# Altium PCB SFP-Interface.PcbDoc
Units mil, origin at the board's own origin, x right, y up, seen from the top; angles counter-clockwise.
Board outline 2000 x 1825 mil, 2 copper layers (Top Layer, Bottom Layer), stack 61.811 mil thick; 39 components, 30 nets, 211 pads, 45 vias.
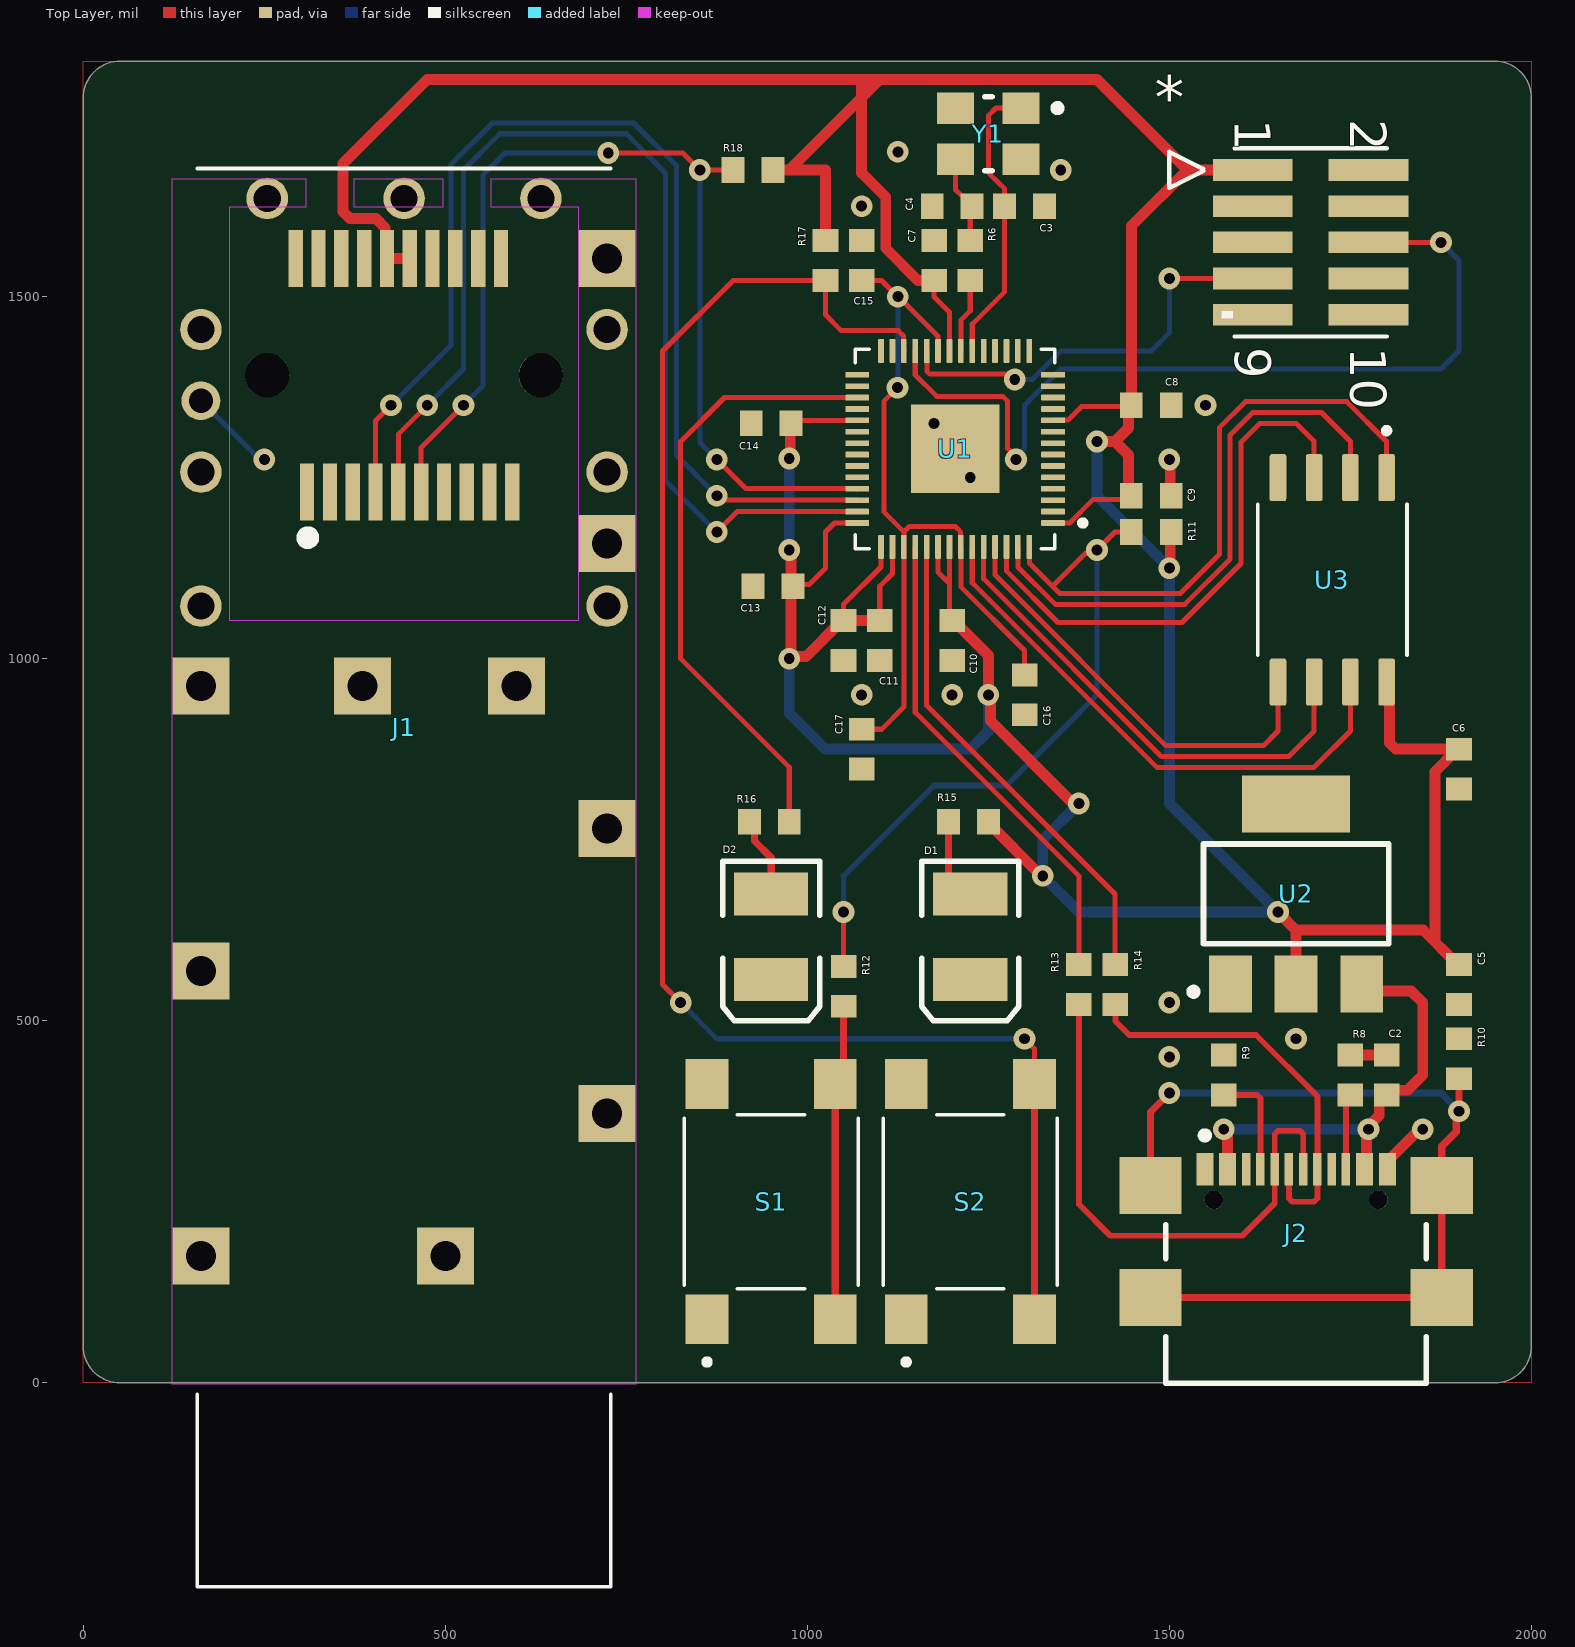
[diagram p0: Top Layer view]
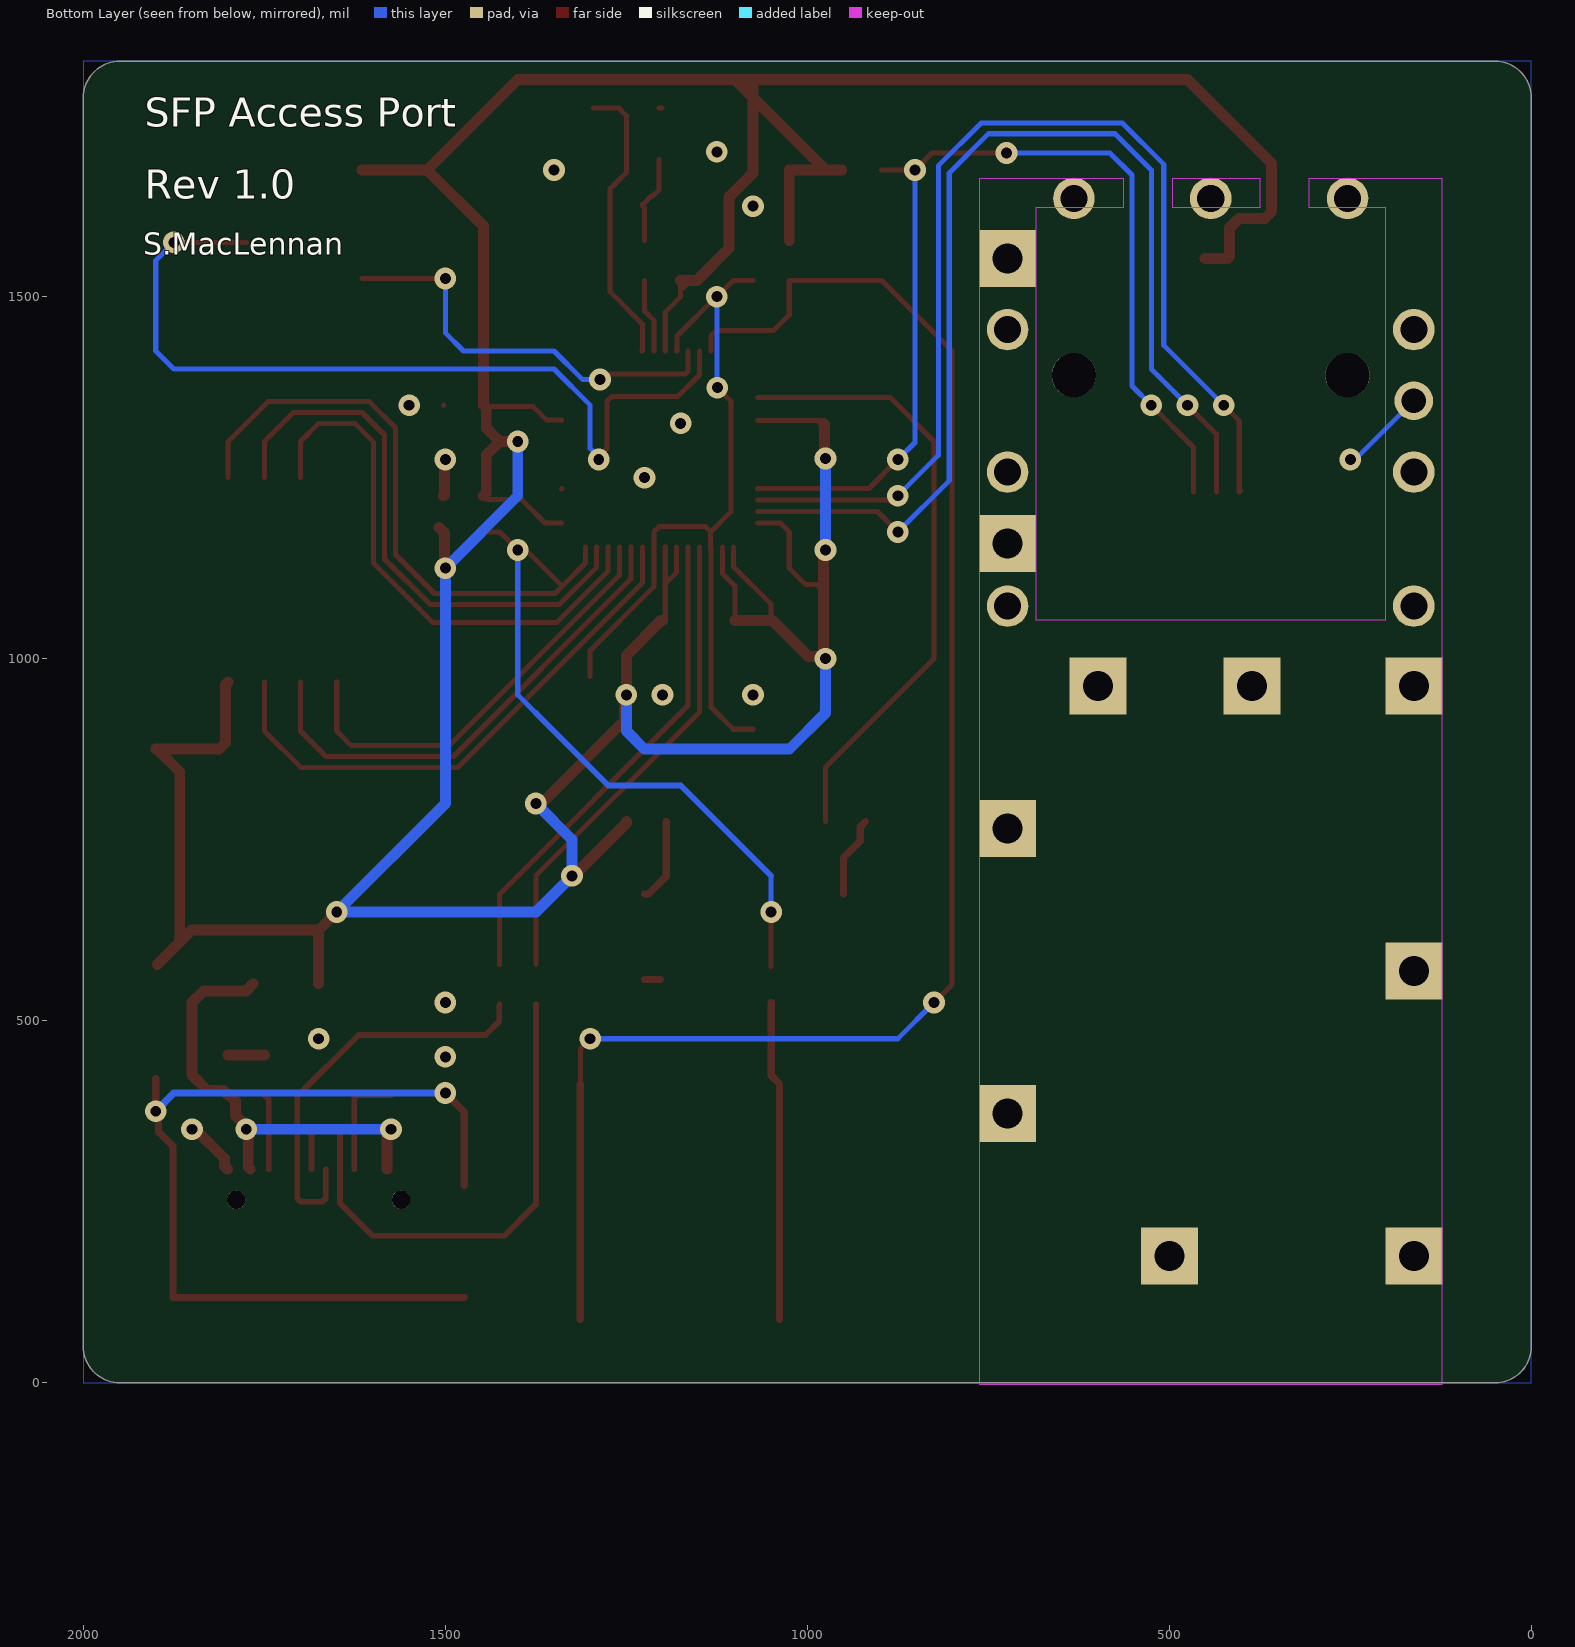
[diagram p1: Bottom Layer view, seen from below]

## Layer stack, top to bottom
Top Solder: solder mask 0.5, Solder Resist, Dk 3.8
Top Layer: signal copper 1.378
Dielectric: core 59.0551, FR-4, Dk 4.5
Bottom Layer: signal copper 1.378
Bottom Solder: solder mask 0.5, Solder Resist, Dk 3.8

## Board outline
0,50 0,1775 cw(c50,1775) 50,1825 1950,1825 cw(c1950,1775) 2000,1775 2000,50 cw(c1950,50) 1950,0 50,0 cw(c50,50)

## Design rules (kind name [scope] priority, off if disabled: settings)
BoardOutlineClearance [All] p1: gap=7.87 ignorepadtopadclearanceinfootprint=FALSE except(15.75: Arc-SplitBarrior Arc-SplitContinuation Track-SplitBarrior Track-SplitContinuation SMDPad-SplitBarrior SMDPad-SplitContinuation THPad-SplitBarrior THPad-SplitContinuation Via-SplitBarrior Via-SplitContinuation Fill-SplitBarrior Fill-SplitContinuation Poly-SplitBarrior Poly-SplitContinuation Region-SplitBarrior Region-SplitContinuation Text-SplitBarrior Text-SplitContinuation)
Clearance "Clearance Bottom Layer" [OnLayer('Bottom Layer')] p1: gap=8 ignorepadtopadclearanceinfootprint=TRUE except(10: Arc-Text Track-Text SMDPad-Text THPad-Text Via-Text Fill-Text Poly-Text Region-Text Text-Text)
Clearance "Clearance Top Layer" [OnLayer('Top Layer')] p2: gap=8 ignorepadtopadclearanceinfootprint=TRUE except(10: Arc-Via Arc-Text Track-Via Track-Text SMDPad-Text THPad-Text Via-Via Via-Text Fill-Text Poly-Text Region-Text Text-Text)
Clearance [All] p3: gap=7.87 ignorepadtopadclearanceinfootprint=FALSE except(3.5: Arc-Arc Arc-Track Arc-SMDPad Track-Track Track-SMDPad SMDPad-SMDPad; 5: Arc-Via Track-Via SMDPad-Via THPad-Via Via-Via; 10: Arc-Text Track-Text SMDPad-Text THPad-Text Via-Text Fill-Text Poly-Text Region-Text Text-Text)
HoleSize [All] p1: absolutevalues=TRUE maxlimit=248.03 minlimit=7.87 maxpercent=80.000 minpercent=20.000
MinimumAnnularRing [All] p1: minimumring=3
MinimumSolderMaskSliver [All] p1: minsoldermaskwidth=3.94
PolygonConnect PolygonConnect_1 [All] p1: thpad.connectstyle=Relief thpad.reliefconductorwidth=20 thpad.reliefentries=4 thpad.polygonreliefangle="90 Angle" thpad.airgapwidth=10 smdpad.connectstyle=Relief smdpad.reliefconductorwidth=20 smdpad.reliefentries=4 smdpad.polygonreliefangle="90 Angle" smdpad.airgapwidth=10 via.connectstyle=Direct via.reliefconductorwidth=20 via.reliefentries=4 via.polygonreliefangle="90 Angle" via.airgapwidth=10
RoutingCorners [All] p1: cornerstyle=Round minsetback=100 maxsetback=100
RoutingVias [All] p1: holewidth=19.68 width=39.37 viastyle="Through Hole" minholewidth=7.87 minwidth=17.72 maxholewidth=39.37 maxwidth=78.74
SilkToSilkClearance [All] p1: silktosilkclearance=3.94
SilkToSolderMaskClearance [IsPad] p1: minsilkscreentomaskgap=3.94 clearancetoexposedcopper=TRUE
SolderMaskExpansion [All] p1: expansion=4 istentingtop=FALSE
Width [All] p1: maxlimit=15 minlimit=3.5 preferedwidth=7 minimp=50.000000 maximp=50.000000 favimp=50.000000
25 further rules are at their usual default settings.

## Classes and differential pairs
component class SFP-Interface: C2 C3 C4 C5 C6 C7 C8 C9 C10 C11 C12 C13 C14 C15 C16 C17 D1 D2 J1 J2 R6 R8 R9 R10 R11 R12 R13 R14 R15 R16 R17 S1 S2 U1 U2 U3 Y1

## Components (designator, comment, footprint, x,y, rotation, side; value= is the part's Value field where it differs from the comment)
* "4048" 4048-Footprint-1 1570,1570 r270 top
C2 "Capacitor" 1608[0603] 1800,425 r270 top value=10uF
C3 "Capacitor" 1608[0603] 1300,1625 r180 top value=14pF
C4 "Capacitor" 1608[0603] 1200,1625 r0 top value=14pF
C5 "Capacitor" 1608[0603] 1900,550 r90 top value=10uF
C6 "Capacitor" 1608[0603] 1900,847.44 r90 top value=10nF
C7 "Capacitor" 1608[0603] 1175,1550 r270 top value=100nF
C8 "Capacitor" 1608[0603] 1475,1350 r180 top value=100nF
C9 "Capacitor" 1608[0603] 1475,1225 r180 top value=100nF
C10 "Capacitor" 1608[0603] 1200,1025 r90 top value=100nF
C11 "Capacitor" 1608[0603] 1100,1025 r90 top value=100nF
C12 "Capacitor" 1608[0603] 1050,1025 r90 top value=100nF
C13 "Capacitor" 1608[0603] 952.56,1100 r0 top value=100nF
C14 "Capacitor" 1608[0603] 950,1325 r0 top value=1uF
C15 "Capacitor" 1608[0603] 1075,1550 r270 top value=100nF
C16 "Capacitor" 1608[0603] 1300,950 r90 top value=100nF
C17 "Capacitor" 1608[0603] 1075,875 r90 top value=1uF
D1 "Light-Emitting Diode" 3.5X2.8X1.9 1225,615.94 r270 top
D2 "Light-Emitting Diode" 3.5X2.8X1.9 950,615.94 r270 top
J1 "2227023-1" TE_2227023-1 442.91,1391.54 r90 top locked
J2 "USB4110-GF-A" FP-USB4110-GF-A-MFG 1675,150 r0 top locked
R6 "Resistor" 1608[0603] 1225,1550 r270 top value=1K
R8 "Resistor" 1608[0603] 1750,425 r270 top value=5K11
R9 "Resistor" 1608[0603] 1575,425 r90 top value=5K11
R10 "Resistor" 1608[0603] 1900,447.44 r90 top value=1M
R11 "Resistor" 1608[0603] 1475,1175 r0 top value=10K
R12 "Resistor" 1608[0603] 1050,547.44 r270 top value=1K
R13 "Resistor" 1608[0603] 1375,550 r270 top value=27.4
R14 "Resistor" 1608[0603] 1425,550 r270 top value=27.4
R15 "Resistor" 1608[0603] 1222.44,775 r0 top value=55
R16 "Resistor" 1608[0603] 947.44,775 r0 top value=55
R17 "Resistor" 1608[0603] 1025,1550 r90 top value=10K
R18 "Resistor" 1608[0603] 925,1675 r180 top value=10K
S1 "TS05-66-43-BK-260-SMT-67" SW_TS05-66-43-BK-260-SMT-67 950,250 r90 top
S2 "TS05-66-43-BK-260-SMT-67" SW_TS05-66-43-BK-260-SMT-67 1225,250 r90 top
U1 "SC0908(7)" QFN40P700X700X90-57N 1204.13,1289.76 r180 top locked
U2 "NCP1117ST33T3G" ONSC-SOT-223-4-318H-01_A_V 1675,675 r90 top
U3 "AT25SF128A-SHB-T" SOIC127P790X216-8N 1725,1108.86 r270 top
Y1 "ECS-120-12-33Q-JES-TR" FP-ECX-33Q-MFG 1250,1725 r180 top

## Footprints (in the part's own frame and the unit in brackets; to place one, negate y for a bottom-side part, rotate by r counter-clockwise, add the part's x,y. Pads: shape width x height; smd on the part's side, far side on the other; paste and mask are expansions set on the pad)
3.5X2.8X1.9 [mm] "SM LED; 2 C-Bend Leads; Body 3.5 x 2.8 x 1.9 mm, inc leads (LxWxH typ)"
  rect 1.5x2.6 smd: 1(-1.5,0) 2(1.5,0)
  silkscreen extent -2.65,-1.7 2.95,1.7
1608[0603] [mm] "Chip Capacitor, Body 1.6x0.8mm, IPC High Density"
  rect 0.8x0.9 smd: 1(-0.7,0) 2(0.7,0)
  body extent -0.87,-0.48 0.87,0.48, height 1.3
4048-Footprint-1 [mil]
  rect 30x110 smd paste+0 mask+0: 1(-105,45) 2(-105,205) 3(-55,45) 4(-55,205) 5(-5,45) 6(-5,205) 7(45,45) 8(45,205) 9(95,45) 10(95,205)
  silkscreen extent -135,-70 125,230, body extent -130,2 120,248, height 235
FP-ECX-33Q-MFG [mm]
  rect 1.3x1.1 smd paste+0 mask+0: 1(-1.15,-0.9) 2(1.15,-0.9) 3(1.15,0.9) 4(-1.15,0.9)
  silkscreen extent -2.55,-1.3 0.13,1.3, body extent -1.9,-1.55 1.9,1.55, height 0.25
FP-USB4110-GF-A-MFG [mm]
  rect 2.18x2 smd paste+0 mask+0: 1(-5.11,3.105) 2(5.11,3.105) 3(-5.11,-0.825) 4(5.11,-0.825)
  rect 0.6x1.15 smd paste+0 mask+0: A1-B12(-3.2,3.68) A4-B9(-2.4,3.68) B1-A12(3.2,3.68) B4-A9(2.4,3.68)
  rect 0.3x1.15 smd paste+0 mask+0: A5(-1.25,3.68) A6(-0.25,3.68) A7(0.25,3.68) A8(1.25,3.68) B5(1.75,3.68) B6(0.75,3.68) B7(-0.75,3.68) B8(-1.75,3.68)
  round 0.65 hole 0.65 unplated paste-1000 mask+0: ""(-2.89,2.605) ""(2.89,2.605)
  silkscreen extent -4.57,-3.83 4.57,4.99, body extent -6.3,-3.92 6.3,4.36, height 0.25
ONSC-SOT-223-4-318H-01_A_V [mm] "SOT223, 4-Leads, Body 6.5x3.5mm, Pitch 2.3mm"
  rect 2x1.5 smd: 1(-3.15,2.3) 2(-3.15,0) 3(-3.15,-2.3)
  rect 2x3.8 smd: 4(3.15,0)
  silkscreen extent -3.55,-3.25 1.75,3.72, body extent -1.75,-3.25 1.75,3.25, height 1.8
QFN40P700X700X90-57N [mm]
  rrect25% 0.84x0.2 smd: 1(-3.435,2.6) 2(-3.435,2.2) 3(-3.435,1.8) 4(-3.435,1.4) 5(-3.435,1) 6(-3.435,0.6) 7(-3.435,0.2) 8(-3.435,-0.2) 9(-3.435,-0.6) 10(-3.435,-1) 11(-3.435,-1.4) 12(-3.435,-1.8) 13(-3.435,-2.2) 14(-3.435,-2.6) 29(3.435,-2.6) 30(3.435,-2.2) 31(3.435,-1.8) 32(3.435,-1.4) 33(3.435,-1) 34(3.435,-0.6) 35(3.435,-0.2) 36(3.435,0.2) 37(3.435,0.6) 38(3.435,1) 39(3.435,1.4) 40(3.435,1.8) 41(3.435,2.2) 42(3.435,2.6)
  rrect25% 0.2x0.84 smd: 15(-2.6,-3.435) 16(-2.2,-3.435) 17(-1.8,-3.435) 18(-1.4,-3.435) 19(-1,-3.435) 20(-0.6,-3.435) 21(-0.2,-3.435) 22(0.2,-3.435) 23(0.6,-3.435) 24(1,-3.435) 25(1.4,-3.435) 26(1.8,-3.435) 27(2.2,-3.435) 28(2.6,-3.435) 43(2.6,3.435) 44(2.2,3.435) 45(1.8,3.435) 46(1.4,3.435) 47(1,3.435) 48(0.6,3.435) 49(0.2,3.435) 50(-0.2,3.435) 51(-0.6,3.435) 52(-1,3.435) 53(-1.4,3.435) 54(-1.8,3.435) 55(-2.2,3.435) 56(-2.6,3.435)
  rect 3.1x3.1 smd paste-0.57: 57(0,0)
  silkscreen extent -4.57,-3.5 3.5,3.5, body extent -3.5,-3.5 3.5,3.5, height 0.9
SOIC127P790X216-8N [mm]
  rrect25% 1.65x0.58 smd: 1(-3.585,1.905) 2(-3.585,0.635) 3(-3.585,-0.635) 4(-3.585,-1.905) 5(3.585,-1.905) 6(3.585,-0.635) 7(3.585,0.635) 8(3.585,1.905)
  silkscreen extent -5.33,-2.62 2.65,2.62, body extent -3.99,-2.62 3.99,2.62, height 2.16
SW_TS05-66-43-BK-260-SMT-67 [mm]
  rect 1.75x1.5 smd: 1(-4.125,2.25) 2(-4.125,-2.25) 3(4.125,2.25) 4(4.125,-2.25)
  silkscreen extent -5.72,-3.05 3.05,3.05
TE_2227023-1 [mm]
  rect 2x0.5 smd: 1(-4.1,3.4) 2(-4.1,2.6) 3(-4.1,1.8) 4(-4.1,1) 5(-4.1,0.2) 6(-4.1,-0.6) 7(-4.1,-1.4) 8(-4.1,-2.2) 9(-4.1,-3) 10(-4.1,-3.8) 11(4.1,-3.4) 12(4.1,-2.6) 13(4.1,-1.8) 14(4.1,-1) 15(4.1,-0.2) 16(4.1,0.6) 17(4.1,1.4) 18(4.1,2.2) 19(4.1,3) 20(4.1,3.8)
  round 1.358 hole 0.85: S1(-0.9,7.125)
  round 1.458 hole 0.95: S2(1.6,7.125) S3(-3.4,7.125) S4(-8.1,7.125) S5(6.2,4.8) S6(6.2,0) S7(6.2,-4.8) S8(1.6,-7.125) S9(-3.4,-7.125) S10(-8.1,-7.125)
  rect 2x2 hole 1.05: S11(-10.9,7.125) S12(-20.9,7.125) S13(-30.9,7.125) S14(-10.9,1.45) S15(-30.9,-1.45) S16(-10.9,-3.95) S17(-25.9,-7.125) S18(-15.9,-7.125) S19(-5.9,-7.125) S20(4.1,-7.125)
  round 1.55 hole 1.55 unplated: ""(0,4.8) ""(0,-4.8)
  Keep-Out Layer region: 6.9,3.445 5.9,3.445 5.9,6.125 -8.6,6.125 -8.6,-6.125 5.9,-6.125 5.9,-3.055 6.9,-3.055 6.9,-8.125 -35.4,-8.125 -35.4,8.125 6.9,8.125
  Keep-Out Layer region: 6.9,-1.355 5.9,-1.355 5.9,1.745 6.9,1.745
  Keep-Out Layer region: 6.9,3.445 5.9,3.445 5.9,6.125 -8.6,6.125 -8.6,-6.125 5.9,-6.125 5.9,-3.055 6.9,-3.055 6.9,-8.125 -35.4,-8.125 -35.4,8.125 6.9,8.125
  Keep-Out Layer region: 6.9,-1.355 5.9,-1.355 5.9,1.745 6.9,1.745
  Keep-Out Layer region: 6.9,3.445 5.9,3.445 5.9,6.125 -8.6,6.125 -8.6,-6.125 5.9,-6.125 5.9,-3.055 6.9,-3.055 6.9,-8.125 -35.4,-8.125 -35.4,8.125 6.9,8.125
  Keep-Out Layer region: 6.9,-1.355 5.9,-1.355 5.9,1.745 6.9,1.745
  silkscreen extent -42.5,-7.25 7.25,7.25

## Part data
*: library part CMP-002-00071-2, "Mini SWD 0.05\" Pitch Connector - 10 Pin SMT Box Header"
D1 D2: library part LED, AF=1, BV=0, BV_MAX=1e99, CJO=0, CJP=0, CTA=0, CTP=0, EG=1.11, FC=0.5, FCS=0.5, FV_MAX=1e99, IBV=0.001, IKF=0, IKR=0, IS=1e-14, ISR=1e-14, JSW=0, JTUN=0, JTUNSW=0, KEG=1, KF=0, LEVEL=1, MJSW=0.33, N=1, NBV=1, NR=1, NS=1, NTUN=30, PHP=1, RS=0, SimulationGenericComponent=True, TCV=0, TLEV=0, TLEVC=0, TM1=0, TM2=0, TNOM=27, TPB=0, TPHP=0, TRS=0, TRS2=0, TT=0, TTT1=0, TTT2=0, VJ=1, XTI=3, XTITUN=3
J1: "Connector Accessories 1 Port SFP Cage Press Fit Right Angle Through Hole Nickel Tray", Package=None, Availability=Unavailable, EU_RoHS_Compliance=Compliant, MF="TE Connectivity", MP=2227023-1, Price=None, Product_Type=Cage, SnapEDA_Link=https://www.snapeda.com/parts/2227023-1/TE%20Connectivity%20AMP%20Connectors/view-part/1472255/?ref=snap, TE_purchase_URL=https://www.te.com/usa-en/product-2227023-1.html?te_bu=Cor&te_type=disp&te_campaign=seda_glo_cor-seda-global-disp-prtnr-fy19-seda-model-bom-cta_sma-317_1&elqCampaignId=32493
J2: library part CMP-245163-000002-1, "CONN USB 2.0 TYPE-C R/A SMT", Current Rating=3/4.25/1.25/0.25A, Manufacturer=GCT, Package=0, Temperature="-40°C to +85°C", Temperature Range High=+85°C, Temperature Range Low=-40°C, Voltage Rating=20V, Automotive=No, Category=Conn, ComponentLink2Description=Datasheet, ComponentLink2URL=https://gct.co/files/drawings/usb4110.pdf, Conn Orientation="Right Angle", Contact Material=Gold,Nickel, Device Class L1=Connectors, Device Class L2="USB Connectors", Device Class L3=unset, Digikey Description="CONN USB 2.0 TYPE-C R/A SMT", Height=3.46mm, Is Female=yes, Lead Free=Yes, Manufacturer Part Number=USB4110-GF-A, Number Of Contacts=16, Octopart=https://octopart.com/usb4110-gf-a-gct-103941985, RoHS=TRUE, Shielding=true, Standoff Height=0.1mm, Usb Standard="USB 2.0"
S1 S2: "6 x 6 mm, 4.3 ~ 8 mm Actuator Height, 100 ~ 260 gf, Surface Mount, IP67, SPST, Tactile Switch", Package=None, Availability="In Stock", Check_prices=https://www.snapeda.com/parts/TS05-66-43-BK-260-SMT-67/CUI+Devices/view-part/?ref=eda, CUI_purchase_URL=https://www.cuidevices.com/product/switches/tactile-switches/ts05-series?utm_source=snapeda.com&utm_medium=referral&utm_campaign=snapedaBOM, MF="CUI Devices", MP=TS05-66-43-BK-260-SMT-67, Price=None, Purchase-URL=https://pricing.snapeda.com/search/part/TS05-66-43-BK-260-SMT-67/?ref=eda, SnapEDA_Link=https://www.snapeda.com/parts/TS05-66-43-BK-260-SMT-67/CUI+Devices/view-part/?ref=snap
U1: "No Description Available", Mfr_Name="Raspberry Pi", Copyright="Copyright (C) 2022 Ultra Librarian. All rights reserved.", Digi-Key_Part_Number_1=2648-SC0908(7)TR-ND, Digi-Key_Part_Number_2=2648-SC0908(7)CT-ND, Digi-Key_Part_Number_3=2648-SC0908(7)DKR-ND, Manufacturer_Part_Number=SC0908(7), RefDes=RefDes, Type=DEV
U2: library part CMP-1679-00010-1, "Low-Dropout Positive Fixed Voltage Regulator, 1 A, 3.3 V Output Voltage, 0 to 125 degC, 4-Pin SOT-223 (318H-01), Pb-Free, Tape and Reel", Case Code (Imperial)=0603, Case Code (Metric)=1608, Max Operating Temperature="155 degC", Min Operating Temperature="-55 degC", Package Quantity=5000, Power Rating="100 mW", Resistance="220 kohm", Tolerance=1%, Type (Resistor)="Thick Film", Voltage Rating="75 V", Case\Package=0603, ComponentLink1Description="Manufacturer URL", ComponentLink1URL=http://www.onsemi.com/, ComponentLink2Description=Datasheet, ComponentLink2URL=http://www.onsemi.com/pub_link/Collateral/NCP1117-D.PDF, DatasheetVersion="Rev. 27, 09/2014", Height="0.45 mm", Length="1.55 mm", Mount="Surface Mount", PackageDescription="4-Pin Small Outline Transistor, Body 6.5 x 3.5 mm, Pitch 2.3 mm", PackageReference=SOT-223-4-318H-01_A, Packaging="Tape and Reel", Radiation Hardening=No, REACH SVHC=Unknown, RoHSCompliant=true, Weight="7.1E-05 oz", Width="0.85 mm"
U3: "No Description Available", Mfr_Name="Adesto Technologies", Copyright="Copyright (C) 2022 Ultra Librarian. All rights reserved.", Digi-Key_Part_Number_1=1265-1348-2-ND, Digi-Key_Part_Number_2=1265-1348-1-ND, Digi-Key_Part_Number_3=1265-1348-6-ND, Manufacturer_Part_Number=AT25SF128A-SHB-T, RefDes=RefDes, Type=DEV
Y1: library part CMP-40224-000015-1, "CRYSTAL 12.000MHZ 12PF SMD", Case/Package=SMD/SMT, ESR (Equivalent Series Resistance)=100R, Frequency=12MHz, Frequency Stability=50ppm, Frequency Tolerance=20ppm, Load Capacitance=12pF, Max Operating Temperature=125°C, Min Operating Temperature=-40°C, Ratings=AEC-Q200, Height=0.031inch, Length=0.126inch, Mount="Surface Mount", Packaging="Tape and Reel", Width=0.098inch
C2 C3 C4 C5 C6 C7 C8 C9 C10 C11 C12 C13 C14 C15 C16 C17: SimulationGenericComponent=True
R6 R8 R9 R10 R11 R12 R13 R14 R15 R16 R17 R18: SimulationGenericComponent=True, TC1=0, TC2=0

## Via types
v1: diameter 30, hole 15, Top Layer to Bottom Layer, 45 vias

## Nets (pads, with @x,y where several pads share a name; then routed paths per layer and width w, separated by ;. In a path a pad name is that pad's centre, name@x,y a point inside that pad or via, vN(x,y) a via of type N, cw(c..) or ccw(c..) an arc to the next point about the centre after c; other vN are vias at no path point)
+3.3V: *.1 C5.2 C6.2 C7.2 C8.2 C9.2 C10.2 C11.2 C12.2 C13.2 C14.2 J1.15 J1.16 R11.2 R15.2 R17.2 R18.1 U1.1 U1.10 U1.22 U1.33 U1.42 U1.43 U1.44 U1.48 U1.49 U2.2 U3.8 | length 7208.4
  Top Layer w7: C14.2 981.69,1329.13 U1.33 ; C13.2 982.38,1102.27 1002.27,1102.27 1025,1125 1025,1175 1037.4,1187.4 U1.42 ; C12.2 1050,1075 1101.77,1126.77 U1.43 ; C11.2 1100,1100 1117.52,1117.52 U1.44 ; C7.2@1160.63,1522.83 1160.78,1522.83 1171.42,1512.2 C7.2@1175,1512.2 ; C7.2 C7.2@1175,1512.2 ; U1.48 1180.51,1119.49 1196.26,1103.74 ; U1.49 1196.26,1103.74 ; U1.22 1196.26,1478.44 1175,1499.7 C7.2@1175,1512.2 ; C10.2 1196.26,1056.3 1196.26,1103.74 ; U1.1 1362.4,1187.4 1395.02,1220.02 1442.46,1220.02 C9.2 ; U1.10 1339.68,1329.44 1360.09,1329.44 1378.68,1348.03 C8.2@1447.44,1348.03
  Top Layer w15: J1.15 J1.16 416.95,1555.3 416.95,1594.93 404.06,1607.82 368.29,1607.82 358.71,1617.4 358.71,1683.71 475,1800 1075,1800 ; R18.1 975,1675 ; v1(975,1000) v1@977.56,1002.56 ; v1(975,1150) 977.56,1147.44 C13.2@977.56,1102.56 ; v1(975,1276.5) 976.28,1277.78 976.28,1323.72 C14.2 ; C13.2 C13.2@977.56,1102.56 ; R17.2 1025,1675 975,1675 ; C11.2 C12.2 1048.03,1052.56 998.34,1002.87 977.87,1002.87 v1@977.56,1002.56 ; C7.2 1152.56,1522.44 1108.22,1566.78 1108.22,1637.75 1075,1670.96 1075,1775 ; C10.2 1201.97,1052.56 1250,1004.53 v1(1250,950) 1252.87,947.13 1252.87,914.19 1364.19,802.87 1372.13,802.87 v1(1375,800) ; R15.2 1250,773.03 1323.03,700 v1(1325,700) ; v1(1400,1300) 1425,1300 ; C9.2 1443.58,1228.86 1443.58,1281.42 1425,1300 ; v1(1500,1125) 1501.28,1126.28 1501.28,1173.72 R11.2 R11.2@1508.98,1181.42 ; *.1 1525,1675 ; v1(1650,650) 1675,625 ; U2.2 1675,625 ; U3.8 1803.92,963.8 1803.92,883.79 1812.7,875 C6.2 ; 1866.78,610.78 1866.78,731.39 1866.78,843.75 C6.2@1894.71,871.68 ; C5.2@1898.03,577.56 1850.59,625 1675,625 ; 975,1675 1075,1775 ; v1@977.56,1002.56 C13.2@977.56,1102.56 ; 1075,1775 1075,1800 ; 1075,1775 1100,1800 ; 1075,1800 1100,1800 ; 1100,1800 1400,1800 1525,1675 ; 1425,1300 1443.58,1318.58 1443.58,1346.14 C8.2 1447.44,1597.44 1525,1675
  Bottom Layer w15: v1(975,1000) 975,925 1025,875 1225,875 1250,900 v1(1250,950) ; v1(975,1150) v1(975,1276.5) ; v1(1375,800) 1325,750 v1(1325,700) 1375,650 v1(1650,650) 1500,800 v1(1500,1125) 1400,1225 v1(1400,1300)
+5V: C2.2 J2.A4-B9 J2.B4-A9 U2.3 | length 630.4
  Top Layer w15: v1(1575,350) 1575,345.94 1580.51,340.43 J2.A4-B9 ; U2.3 1775.33,541.21 1833.79,541.21 1850,525 1850,425 1828.86,403.86 1806.42,403.86 C2.2 1798.03,397.44 1789.78,389.19 1789.78,368.84 1775,354.06 v1(1775,350) 1772.24,347.24 1772.24,297.64 J2.B4-A9
  Bottom Layer w15: v1(1575,350) v1(1775,350)
GND: *.2 *.3 *.4 *.5 C2.1 C3.1 C4.1 C5.1 C6.1 C7.1 C8.1 C9.1 C10.1 C11.1 C12.1 C13.1 C14.1 C15.1 C16.1 C17.1 D1.2 D2.2 J1.1 J1.9 J1.10 J1.11 J1.14 J1.17 J1.20 J1.S1 J2.A1-B12 J2.B1-A12 R8.1 R9.2 R10.2 S1.1 S1.3 S2.1 S2.3 U1.57 U2.1 U3.4 Y1.2 Y1.4 | length 326
  Top Layer w7: Y1.2@1200.79,1760.43 Y1.2
  Top Layer w10: D1.2@1203.35,556.89 D1.2
  Top Layer w15: v1(1500,1275) 1501.28,1273.72 1501.28,1226.28 C9.1 ; R8.1 C2.1 ; J2.B1-A12 1805.3,299.19 1805.3,310.02 1842.41,347.13 1847.13,347.13 v1(1850,350)
  Bottom Layer w7: J1.S1 239.1,1279.4 245.6,1279.4 v1(250,1275)
  other v1: 1500,450 1675,475 1500,525 1075,950 1200,950 1225,1250 1175,1325 1550,1350 1075,1625 1350,1675 1125,1700
Net*_6: *.6 U1.25 | length 1232.5
  Top Layer w7: U1.25 1149.02,1391.87 1178.6,1362.29 1269.92,1362.29 1276.66,1355.55 1276.66,1290.6 1288.16,1279.1 v1(1288.16,1275) ; *.6 v1(1875,1575)
  Bottom Layer w7: v1(1288.16,1275) 1288.16,1278.76 1300,1290.6 1300,1350 1350,1400 1875,1400 1900,1425 1900,1550 v1(1875,1575)
Net*_7: *.7 U1.24 | length 584.5
  Top Layer w7: U1.24 1165.07,1424.69 1165.07,1397.02 1169.18,1392.92 1272.81,1392.92 1280.23,1385.5 v1(1286.45,1385.5) ; v1(1500,1525) *.7
  Bottom Layer w7: v1(1286.45,1385.5) 1286.78,1385.82 1310.82,1385.82 1350,1425 1475,1425 1500,1450 v1(1500,1525)
NetC3_2: C3.2 U1.20 Y1.1 | length 403
  Top Layer w7: U1.20@1228.07,1425.31 U1.20 1227.76,1462 1272.44,1506.68 1272.44,1649.14 1265.17,1656.41 1264.92,1656.41 1250,1671.33 1250,1750 1260.43,1760.43 Y1.1
NetC4_2: C4.2 R6.1 Y1.3 | length 123.7
  Top Layer w7: Y1.3 1204.72,1647.83 1213.34,1639.22 1215.31,1639.22 1227.56,1626.97 C4.2 1225,1622.44 R6.1
NetC15_2: C15.2 C16.2 C17.2 U1.23 U1.45 U1.50 | length 1135.3
  Top Layer w7: C17.2 1102.56,902.56 1133.27,933.27 U1.45 1133.58,1154.84 1133.58,1175.25 1140.89,1182.56 1204.38,1182.56 1211.7,1175.25 1211.7,1154.84 U1.50 1212.01,1099.35 1300,1011.36 C16.2@1300,975.59 ; C15.2 1102.37,1522.44 v1@1124.81,1500 ; v1(1124.38,1374.38) 1105.67,1355.67 1105.67,1202.85 1133.27,1175.25 ; v1(1125,1500) 1125.92,1500 1180.2,1445.72 1180.2,1425.31 U1.23
  Bottom Layer w7: v1(1124.38,1374.38) 1125,1375 v1(1125,1500)
NetD1_1: D1.1 R15.1 | length 115.8
  Top Layer w10: R15.1 1194.88,699.53 1219.41,675 D1.1
NetD2_1: D2.1 R16.1 | length 112.5
  Top Layer w10: R16.1 926.86,768.02 926.86,748.14 950,725 D2.1
NetJ1_4: J1.4 U1.40 | length 1533.3
  Top Layer w7: J1.4@401.77,1231.89 J1.4 403.54,1328.54 v1(425,1350) ; v1(875,1225) 881.1,1218.9 U1.40
  Bottom Layer w7: v1(425,1350) 507.76,1432.76 507.76,1682.76 565,1740 760,1740 819.08,1680.92 819.08,1280.92 v1(875,1225)
NetJ1_5: J1.5 U1.41 | length 1535.2
  Top Layer w7: J1.5 435.04,1310.04 v1(475,1350) ; v1(875,1175) 903.15,1203.15 U1.41
  Bottom Layer w7: v1(475,1350) 525,1400 525,1675 575,1725 750,1725 804.08,1670.92 804.08,1245.92 v1(875,1175)
NetJ1_6: J1.6 R18.2 U1.39 | length 1463.1
  Top Layer w7: J1.6 466.54,1291.54 v1(525,1350) ; v1(725,1698.5) 828,1698.5 v1(851.5,1675) R18.2 ; v1(875,1275) 915.04,1234.96 1068.59,1234.96 U1.39
  Bottom Layer w7: v1(525,1350) 551.69,1376.69 551.69,1667.95 582.24,1698.5 v1(725,1698.5) ; v1@850,1675 v1(851.5,1675) 851.5,1298.5 v1(875,1275)
NetJ2_1: J2.1 J2.2 J2.3 J2.4 R10.1 | length 1263.5
  Top Layer w10: J2.3 J2.4 1876.18,326.61 1896.17,346.61 1896.17,371.17 v1(1900,375) R10.1 ; J2.1 1473.82,373.82 v1(1500,400)
  Bottom Layer w10: v1@1500.08,400 1875,400 v1(1900,375)
NetJ2_A5: J2.A5 R9.1 | length 150.6
  Top Layer w8: R9.1 1621.1,397.44 1625.79,392.75 J2.A5
NetJ2_A6: J2.A6 J2.B6 R14.2 | length 569.5
  Top Layer w8: R14.2 1425.62,521.82 1425.62,499.38 1444.69,480.31 1619.69,480.31 1704.53,395.47 J2.B6 1704.53,254.69 1699.84,250 1669.84,250 1665.16,254.69 J2.A6
NetJ2_A7: J2.A7 J2.B7 R13.2 | length 770.6
  Top Layer w8: R13.2 1375,246.35 1418.48,202.87 1600.5,202.87 1645.47,247.85 1645.47,343.42 1650.16,348.1 1680.16,348.1 1684.84,343.42 J2.A7
NetJ2_B5: J2.B5 R8.2 | length 105.1
  Top Layer w8: J2.B5 1743.9,391.34 R8.2
NetR6_2: R6.2 U1.21 | length 102.8
  Top Layer w7: U1.21 1212.01,1467.46 1225,1480.45 R6.2
NetR11_1: R11.1 R12.1 U1.56 U3.1 | length 1736.8
  Top Layer w7: R12.1 v1(1050,650) ; U1.56 1306.5,1132.14 1338.64,1100 ; R11.1 1425,1175 1395.6,1145.6 1384.24,1145.6 1338.64,1100 ; U3.1 1800,1300 1745,1355 1605,1355 1569,1319 1569,1144 1515,1090 1348.64,1090 1338.64,1100
  Bottom Layer w7: v1(1050,650) 1050,700 ; 1375,925 1400,950 v1(1400,1150)
  Bottom Layer w8: 1050,700 1175,825 1275,825 1375,925
NetR12_2: R12.2 S1.2 S1.4 | length 442.1
  Top Layer w10: S1.2 S1.4 1050,423.82 R12.2 R12.2@1050,525
NetR13_1: R13.1 U1.46 | length 670.6
  Top Layer w7: U1.46 1149.02,925.98 1375,700 1375,650 R13.1
NetR14_1: R14.1 U1.47 | length 684.8
  Top Layer w7: U1.47 1164.76,935.24 1425,675 R14.1
NetR16_2: R16.2 U1.31 | length 856.1
  Top Layer w7: R16.2 975,850 825,1000 825,1300 885.63,1360.63 U1.31
NetR17_1: R17.1 S2.2 S2.4 U1.26 | length 2252.8
  Top Layer w7: v1(825,525) 800,550 800,1425 897.44,1522.44 R17.1 1025,1475 1046.96,1453.04 1125.64,1453.04 1132.96,1445.72 1132.96,1425.31 U1.26 ; v1(1300,475) 1313.58,461.42 S2.4
  Top Layer w10: S2.2 S2.4
  Bottom Layer w7: v1(825,525) 875,475 v1(1300,475)
NetU1_51: U1.51 U3.7 | length 766
  Top Layer w7: U1.51 1227.76,1104.82 1482.69,849.89 1658.33,849.89 1699.89,849.89 1750,900 U3.7
NetU1_52: U1.52 U3.6 | length 684.6
  Top Layer w7: U1.52 1243.5,1110.28 1488.9,864.89 1664.89,864.89 1700,900 U3.6
NetU1_53: U1.53 U3.5 | length 603.3
  Top Layer w7: U1.53 1259.25,1115.75 1495.11,879.89 1629.89,879.89 1650,900 U3.5
NetU1_54: U1.54 U3.3 | length 760.2
  Top Layer w7: U1.54 1275.31,1154.22 1275.31,1120.9 1346.21,1050 1517.43,1050 1599,1131.57 1599,1299 1625,1325 1675,1325 1700,1300 U3.3
NetU1_55: U1.55 U3.2 | length 785.1
  Top Layer w7: U1.55 1291.06,1154.22 1291.06,1126.37 1342.43,1075 1521.21,1075 1584,1137.79 1584,1309 1615,1340 1710,1340 1750,1300 U3.2
pads on no net: *.8 *.9 *.10 J1. J1.2 J1.3 J1.7 J1.8 J1.12 J1.13 J1.18 J1.19 J1.S2 J1.S3 J1.S4 J1.S5 J1.S6 J1.S7 J1.S8 J1.S9 J1.S10 J1.S11 J1.S12 J1.S13 J1.S14 J1.S15 J1.S16 J1.S17 J1.S18 J1.S19 J1.S20 J2. J2.A8 J2.B8 U1.2 U1.3 U1.4 U1.5 U1.6 U1.7 U1.8 U1.9 U1.11 U1.12 U1.13 U1.14 U1.15 U1.16 U1.17 U1.18 U1.19 U1.27 U1.28 U1.29 U1.30 U1.32 U1.34 U1.35 U1.36 U1.37 U1.38 U2.4
copper on no net: | length 0.4
  Top Layer w7: 1339.06,1234.96 1339.37,1234.65

## Polygon pours and split planes (outlines as drawn)
GND on Top Layer "NONET_L01_P002" (solid, shelved, pour order 2): 0,1825 2000,1825 2000,0 0,0
GND on Bottom Layer "NONET_L02_P003" (solid, shelved, pour order 3): 0,1825 2000,1825 2000,0 0,0

## Silkscreen, mask and mechanical layers (free items; w line width, h text height)
Bottom Overlay:
  text "SFP Access Port" at 1915,1735 h40
  text "Rev 1.0" at 1915,1635 h40
  text "S.MacLennan" at 1917,1558 h30
Mechanical 1:
  the board outline again, w0

## Text inside footprints (layer, text, board x,y; h text height)
*: Top Overlay "2" at 1750,1745 h50 r270; Top Overlay "1" at 1590,1745 h50 r270; Top Overlay "10" at 1750,1430 h50 r270; Top Overlay "9" at 1590,1430 h50 r270; Mechanical 13 "2" at 1750,1745 h50 r270; Mechanical 13 "1" at 1590,1745 h50 r270; Mechanical 13 "10" at 1750,1430 h50 r270; Mechanical 13 "9" at 1590,1430 h50 r270